# Altium PCB gclk.PcbDoc
Units mil, origin at the board's own origin, x right, y up, seen from the top; angles counter-clockwise.
Board outline 2400 x 1500 mil, 2 copper layers (Top Layer, Bottom Layer), stack 61.855 mil thick; 33 components, 43 nets, 112 pads, 21 vias.
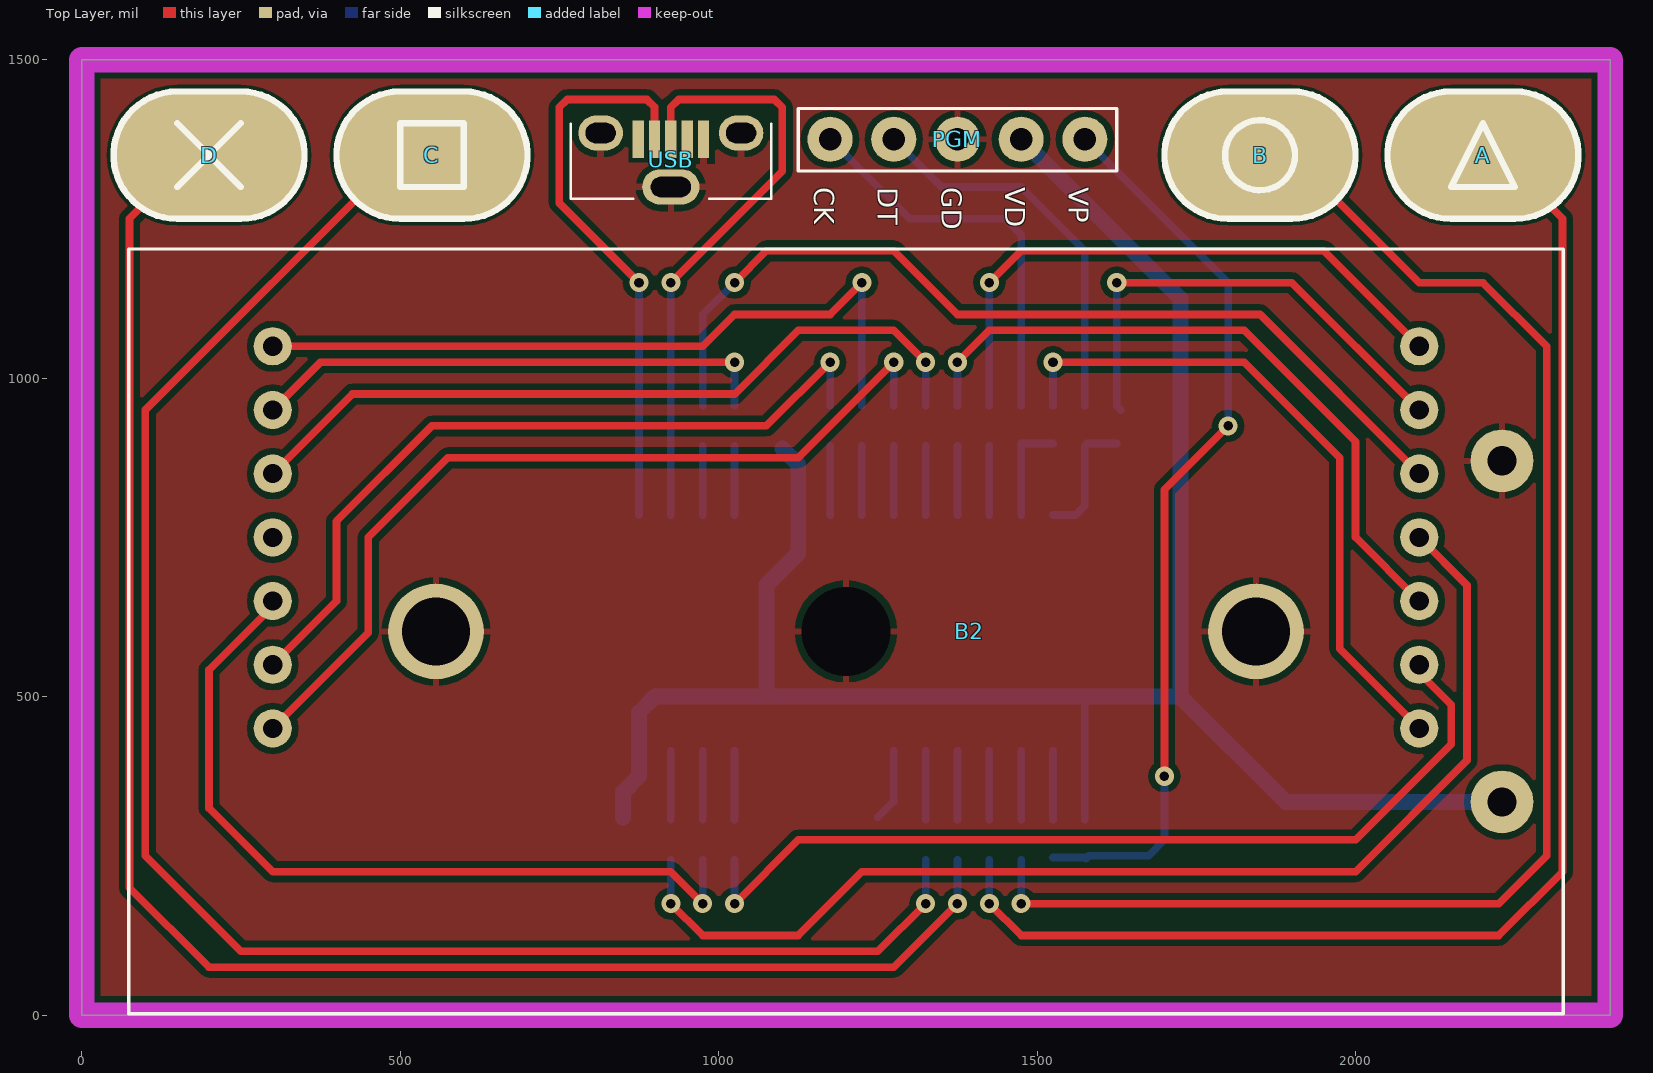
[diagram p0: Top Layer view]
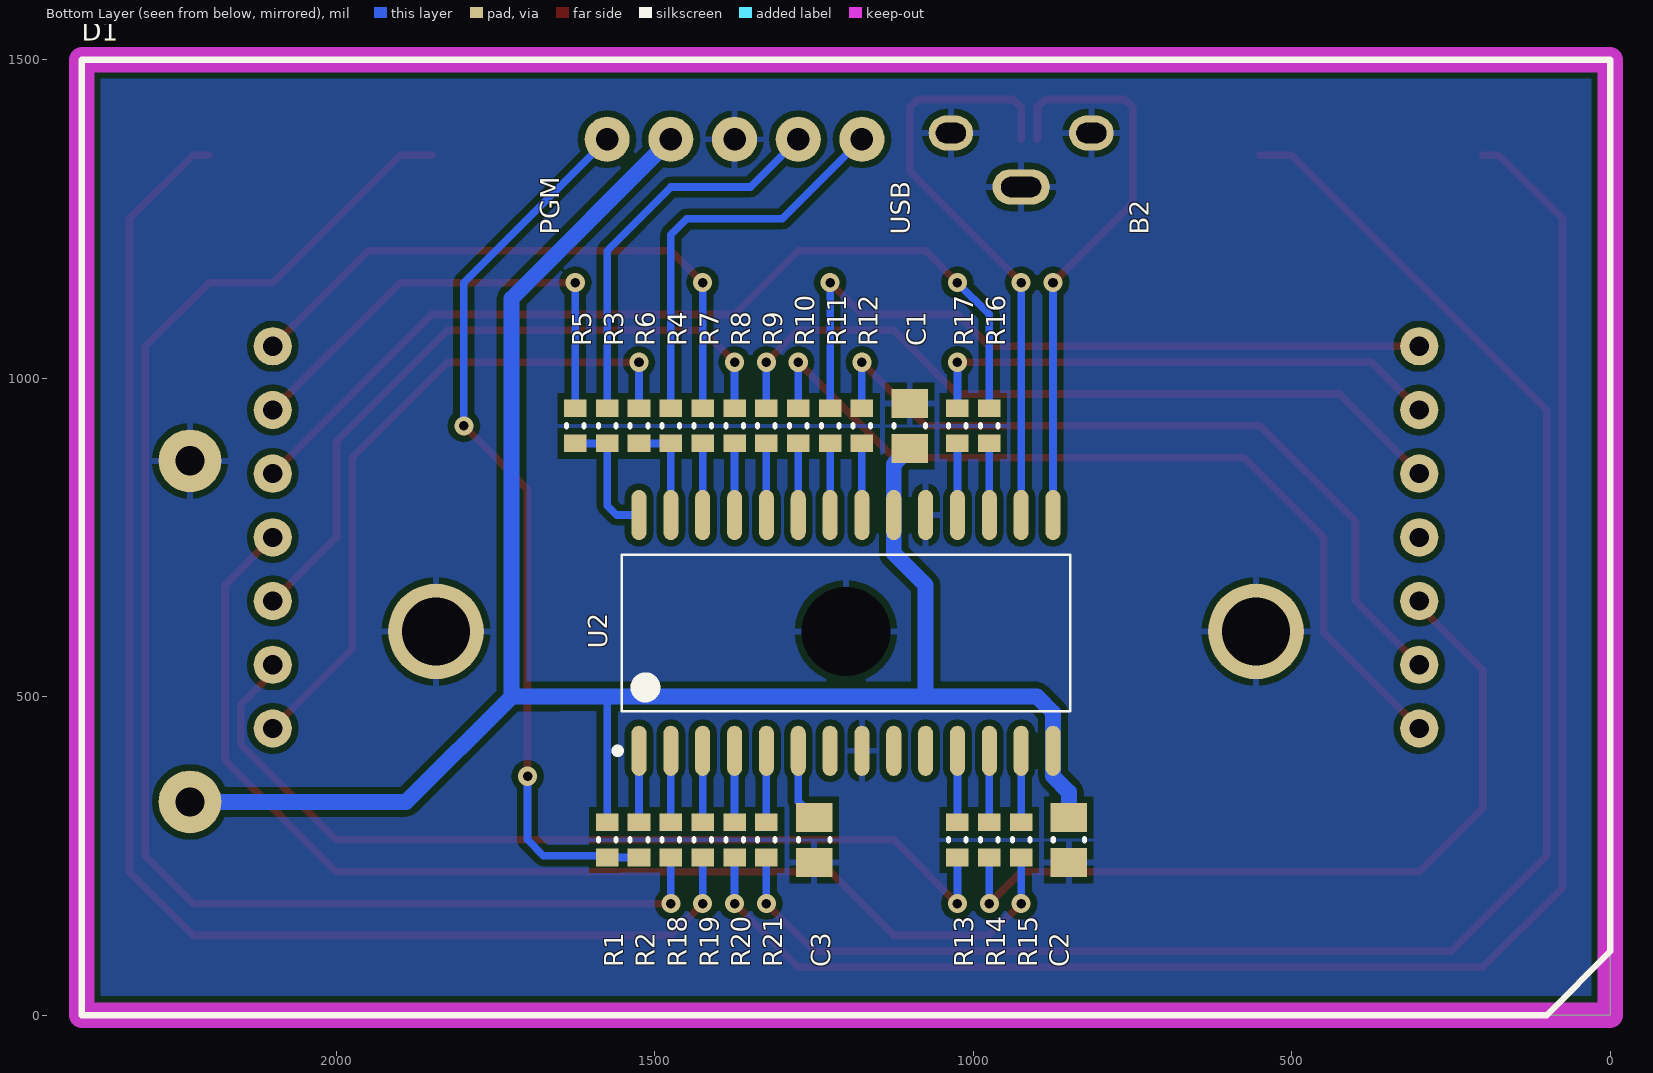
[diagram p1: Bottom Layer view, seen from below]

## Layer stack, top to bottom
Top Layer: signal copper 1.4
Dielectric: core 59.0551, FR-4, Dk 4.8
Bottom Layer: signal copper 1.4

## Board outline
0,0 2400,0 2400,1500 0,1500

## Design rules (kind name [scope] priority, off if disabled: settings)
Clearance Clearance_USB [InComponent('USB')] p1: gap=7
Clearance [All] p2: gap=10
ComponentClearance ComponentClearance_LED [InComponent('D1')] p1: gap=0 collisioncheckmode=3 verticalgap=0 showdistances=FALSE
ComponentClearance [All] p2: gap=10 collisioncheckmode=3 verticalgap=10 showdistances=FALSE
HoleSize [All] p1: absolutevalues=TRUE maxlimit=200 minlimit=10 maxpercent=80.000 minpercent=20.000
MinimumAnnularRing [All] p1: minimumring=5
MinimumSolderMaskSliver [All] p1: minsoldermaskwidth=5
PlaneConnect PlaneConnect_Mount [InPadClass('Mount')] p1: planeconnectstyle=Direct reliefexpansion=20 reliefentries=4 reliefconductorwidth=10 reliefairgap=10
PlaneConnect [All] p2: planeconnectstyle=Relief reliefexpansion=20 reliefentries=4 reliefconductorwidth=10 reliefairgap=10
PolygonConnect [All] p1: connectstyle=Relief reliefconductorwidth=10 reliefentries=4 polygonreliefangle="90 Angle" airgapwidth=10
RoutingVias [All] p1: holewidth=15 width=30 viastyle="Through Hole" minholewidth=15 minwidth=30 maxholewidth=28 maxwidth=50
SilkToSolderMaskClearance [IsPad] p1: minsilkscreentomaskgap=2 clearancetoexposedcopper=TRUE
SolderMaskExpansion [All] p1: expansion=4
Width [All] p1: maxlimit=50 minlimit=10 preferedwidth=12
23 further rules are at their usual default settings.

## Classes and differential pairs
pad class Mount: B2-0

## Components (designator, comment, footprint, x,y, rotation, side; value= is the part's Value field where it differs from the comment)
A "PAD143-190-12GA" PAD143-190-12GA 2200,1350 r90 bottom locked
B "PAD143-190-12GA" PAD143-190-12GA 1850,1350 r90 bottom locked
B2 "2 x AA" BC2AAPC 1200,602.36 r0 top locked
C "PAD143-190-12GA" PAD143-190-12GA 550,1350 r90 bottom locked
C1 "CAP 100nF 50V 0805(2012)" CAPC0805(2012)145_N 1100,925 r270 bottom locked
C2 "CAP 100nF 50V 0805(2012)" CAPC0805(2012)145_N 850,275 r90 bottom locked
C3 "CAP 100nF 50V 0805(2012)" CAPC0805(2012)145_N 1250,275 r90 bottom locked
D "PAD143-190-12GA" PAD143-190-12GA 200,1350 r90 bottom locked
D1 "LED Array" LTP-2158 1200,750 r90 bottom locked
PGM "Program Header" ProgHeader_100 1575,1375 r180 top
R1 "1K" RESC0603(1608)_L 1575,275 r90 bottom locked
R2 "1K" RESC0603(1608)_L 1525,275 r270 bottom locked
R3 "1K" RESC0603(1608)_L 1575,925 r90 bottom locked
R4 "1K" RESC0603(1608)_L 1475,925 r90 bottom locked
R5 "100R" RESC0603(1608)_L 1625,925 r90 bottom locked
R6 "100R" RESC0603(1608)_L 1525,925 r90 bottom locked
R7 "100R" RESC0603(1608)_L 1425,925 r90 bottom locked
R8 "100R" RESC0603(1608)_L 1375,925 r90 bottom locked
R9 "100R" RESC0603(1608)_L 1325,925 r90 bottom locked
R10 "100R" RESC0603(1608)_L 1275,925 r90 bottom locked
R11 "100R" RESC0603(1608)_L 1225,925 r90 bottom locked
R12 "100R" RESC0603(1608)_L 1175,925 r90 bottom locked
R13 "100R" RESC0603(1608)_L 1025,275 r90 bottom locked
R14 "100R" RESC0603(1608)_L 975,275 r90 bottom locked
R15 "100R" RESC0603(1608)_L 925,275 r90 bottom locked
R16 "100R" RESC0603(1608)_L 975,925 r90 bottom locked
R17 "100R" RESC0603(1608)_L 1025,925 r90 bottom locked
R18 "100R" RESC0603(1608)_L 1475,275 r90 bottom locked
R19 "100R" RESC0603(1608)_L 1425,275 r90 bottom locked
R20 "100R" RESC0603(1608)_L 1375,275 r90 bottom locked
R21 "100R" RESC0603(1608)_L 1325,275 r90 bottom locked
U2 "PIC18F26J53 SOIC" "Microchip SOIC 28 Wide" 1200,600 r90 bottom locked
USB "USB" 105133-0001 925,1300.2 r0 top

## Footprints (in the part's own frame and the unit in brackets; to place one, negate y for a bottom-side part, rotate by r counter-clockwise, add the part's x,y. Pads: shape width x height; smd on the part's side, far side on the other; paste and mask are expansions set on the pad)
105133-0001 [mm] "Micro USB B Receptacle Vertical Type"
  oval 1.778x1.397 hole 0.813 slot 1.2 at 0 deg unplated: 0(-2.8,2.15) 0(2.8,2.15)
  oval 2.286x1.397 hole 0.813 slot 1.6 at 0 deg unplated: 0(0,0)
  rect 0.45x1.5 smd: 1(-1.3,1.9) 2(-0.65,1.9) 3(0,1.9) 4(0.65,1.9) 5(1.3,1.9)
  silkscreen extent -4,-0.48 4,2.52, body extent -4.05,-0.53 4.05,2.57, height 6.7
BC2AAPC [mm] "Battery Holder, two AA cells"
  round 3.81 hole 2.7: 0(-16.35,0) 0(16.35,0)
  round 0 hole 3.56: 0(0,0)
  round 2.5 hole 1.17: 1(26.16,-6.8) 2(26.16,6.8)
  silkscreen extent -28.6,-15.25 28.6,15.25, body extent -28.6,-15.25 28.6,15.25, height 15
CAPC0805(2012)145_N [mm] "Chip Capacitor, Body 2.0x1.2mm, Height 1.45mm, IPC Medium Density"
  rect 1.15x1.45 smd: 1(-0.9,0) 2(0.9,0)
  silkscreen extent -0.05,-0.62 0.05,0.63, body extent -1.1,-0.72 1.1,0.73, height 1.45
LTP-2158 [mil] "LED Matrix 5x8 2.3\" Hi Effeciency Red"
  round 60 hole 30: 1(-300,-900) 2(-200,-900) 3(-100,-900) 4(0,-900) 5(100,-900) 6(200,-900) 7(300,-900) 8(300,900) 9(200,900) 10(100,900) 11(0,900) 12(-100,900) 13(-200,900) 14(-300,900)
  silkscreen extent -750,-1200 750,1200, body extent -750,-1200 750,1200, height 352
"Microchip SOIC 28 Wide" [mm] "SOIC, 28-Leads, Body 17.90x7.50mm, Pitch 1.27mm, IPC Medium Density"
  oval 2x0.6 smd: 1(-4.7,8.255) 2(-4.7,6.985) 3(-4.7,5.715) 4(-4.7,4.445) 5(-4.7,3.175) 6(-4.7,1.905) 7(-4.7,0.635) 8(-4.7,-0.635) 9(-4.7,-1.905) 10(-4.7,-3.175) 11(-4.7,-4.445) 12(-4.7,-5.715) 13(-4.7,-6.985) 14(-4.7,-8.255) 15(4.7,-8.255) 16(4.7,-6.985) 17(4.7,-5.715) 18(4.7,-4.445) 19(4.7,-3.175) 20(4.7,-1.905) 21(4.7,-0.635) 22(4.7,0.635) 23(4.7,1.905) 24(4.7,3.175) 25(4.7,4.445) 26(4.7,5.715) 27(4.7,6.985) 28(4.7,8.255)
  silkscreen extent -4.82,-8.95 3.13,9.23, body extent -3.75,-8.95 3.75,8.95, height 2.65
PAD143-190-12GA [mil]
  rrect100% 200x300 smd far side: 1(0,0)
ProgHeader_100 [mm] "Programming Header, 5 Position, 0.100\" centres"
  round 1.8 hole 0.9: 1(0,0) 2(2.54,0) 3(5.08,0) 4(7.62,0) 5(10.16,0)
  silkscreen extent -1.27,-1.23 11.43,1.27, body extent -1.27,-1.23 11.43,1.27, height 5.08
RESC0603(1608)_L [mm] "Chip Resistor, Body 1.6x0.8mm, IPC High Density"
  rect 0.7x0.9 smd: 1(-0.7,0) 2(0.7,0)
  silkscreen extent -0.05,-0.35 0.05,0.35, body extent -0.85,-0.47 0.85,0.47, height 0.6

## Part data
B2: library part BC2AAPC, "Battery Holder"
C1 C2 C3: library part CMP-1036-04422-1, "CAP 100nF 50V ±20% 0805 (2012 Metric) Thickness 1.45mm SMD"
D1: library part LTP-2158, "LED Matrix 5x8 2.3\" Hi Effeciency Red"
PGM: library part ProgHeader_100, "Programming header, 0.100\" centres"
R1 R2 R3 R4: library part CMP-1012-00510-1, "1K 0.1W 1% 0603 (1608 Metric)  SMD"
R5 R6 R7 R8 R9 R10 R11 R12 R13 R14 R15 R16 R17 R18 R19 R20 R21: library part CMP-1012-00397-1, "100R 0.1W 1% 0603 (1608 Metric)  SMD"
USB: library part 105133-0001, "Micro USB B Receptacle Vertical Type"

## Via types
v1: diameter 30, hole 15, Top Layer to Bottom Layer, 21 vias

## Nets (pads, with @x,y where several pads share a name; then routed paths per layer and width w, separated by ;. In a path a pad name is that pad's centre, name@x,y a point inside that pad or via, vN(x,y) a via of type N, cw(c..) or ccw(c..) an arc to the next point about the centre after c; other vN are vias at no path point)
BT1: B.1 R18.1 | length 2298.8
  Top Layer w12: v1(1475,175) 2225,175 2300,250 2300,1050 2200,1150 2100,1150 1900,1350 B.1
  Bottom Layer w12: v1(1475,175) R18.1@1475,243.5
BT2: A.1 R19.1 | length 2222.1
  Top Layer w12: v1(1425,175) 1475,125 2225,125 2325,225 2325,1250 2225,1350 A.1
  Bottom Layer w12: v1(1425,175) R19.1@1425,243.5
BT3: D.1 R20.1 | length 2678.1
  Top Layer w12: D.1 175,1350 75,1250 75,200 200,75 1275,75 v1(1375,175)
  Bottom Layer w12: v1(1375,175) R20.1@1375,243.5
BT4: C.1 R21.1 | length 2702.4
  Top Layer w12: C.1 500,1350 100,950 100,250 250,100 1250,100 v1(1325,175)
  Bottom Layer w12: v1(1325,175) R21.1@1325,243.5
CL1: D1.13 R13.1 | length 1442.8
  Top Layer w12: v1(1025,175) 1125,275 2000,275 2150,425 2150,487.5 2100,537.5 D1.13
  Bottom Layer w12: v1(1025,175) R13.1@1025,243.5
CL2: D1.3 R14.1 | length 1272.1
  Top Layer w12: D1.3 300,642 200,542 200,325 300,225 925,225 v1(975,175)
  Bottom Layer w12: v1(975,175) R14.1@975,243.5
CL3: D1.11 R15.1 | length 1834.2
  Top Layer w12: v1(925,175) 975,125 1125,125 1225,225 2000,225 2175,400 2175,675 D1.11
  Bottom Layer w12: v1(925,175) R15.1@925,243.5
CL4: D1.10 R16.2 | length 1454.9
  Top Layer w12: v1(1025,1150) 1075,1200 1275,1200 1375,1100 1850,1100 D1.10
  Bottom Layer w12: R16.2@975,956.5 975,1100 v1(1025,1150)
CL5: D1.6 R17.2 | length 824.6
  Top Layer w12: D1.6 375,1025 v1(1025,1025)
  Bottom Layer w12: R17.2@1025,956.5 v1(1025,1025)
CLK: PGM.5 R4.2 | length 630.6
  Bottom Layer w12: PGM.5 1300,1250 1450,1250 1475,1225 R4.2@1475,956.5
DAT: PGM.4 R3.2 | length 616
  Bottom Layer w12: PGM.4 1350,1300 1475,1300 1575,1200 R3.2@1575,956.5
GND: B2.0 B2.2 C1.1 C2.1 C3.1 PGM.3 U2.8 U2.19 USB.0 USB.5
MCLR: R2.1 U2.1 | length 108.5
  Bottom Layer w12: R2.1@1525,306.5 U2.1
NetR3_1: R3.1 R5.1 U2.28 | length 201.3
  Bottom Layer w12: U2.28 1560.04,785.04 1575,800 1575,893.5 1578.94,897.44 R5.1
NetR4_1: R4.1 R6.1 U2.27 | length 158.5
  Bottom Layer w12: U2.27 R4.1@1475,893.5 ; R4.1 R6.1
NetR7_1: R7.1 U2.26 | length 108.5
  Bottom Layer w12: U2.26 R7.1@1425,893.5
NetR8_1: R8.1 U2.25 | length 108.5
  Bottom Layer w12: U2.25 R8.1@1375,893.5
NetR9_1: R9.1 U2.24 | length 108.5
  Bottom Layer w12: U2.24 R9.1@1325,893.5
NetR10_1: R10.1 U2.23 | length 108.5
  Bottom Layer w12: U2.23 R10.1@1275,893.5
NetR11_1: R11.1 U2.22 | length 108.5
  Bottom Layer w12: U2.22 R11.1@1225,893.5
NetR12_1: R12.1 U2.21 | length 108.5
  Bottom Layer w12: U2.21 R12.1@1175,893.5
NetR13_2: R13.2 U2.11 | length 108.5
  Bottom Layer w12: R13.2@1025,306.5 U2.11
NetR14_2: R14.2 U2.12 | length 108.5
  Bottom Layer w12: R14.2@975,306.5 U2.12
NetR15_2: R15.2 U2.13 | length 108.5
  Bottom Layer w12: R15.2@925,306.5 U2.13
NetR16_1: R16.1 U2.17 | length 108.5
  Bottom Layer w12: U2.17 R16.1@975,893.5
NetR17_1: R17.1 U2.18 | length 108.5
  Bottom Layer w12: U2.18 R17.1@1025,893.5
NetR18_2: R18.2 U2.2 | length 108.5
  Bottom Layer w12: R18.2@1475,306.5 U2.2
NetR19_2: R19.2 U2.3 | length 108.5
  Bottom Layer w12: R19.2@1425,306.5 U2.3
NetR20_2: R20.2 U2.4 | length 108.5
  Bottom Layer w12: R20.2@1375,306.5 U2.4
NetR21_2: R21.2 U2.5 | length 108.5
  Bottom Layer w12: R21.2@1325,306.5 U2.5
NetU2_15: U2.15 USB.2 | length 901.8
  Top Layer w12: v1(875,1150) 750,1275 750,1425 762.5,1437.5 887.5,1437.5 899.41,1425.59 USB.2
  Bottom Layer w12: U2.15 v1(875,1150)
NetU2_16: U2.16 USB.3 | length 947.8
  Top Layer w12: v1(925,1150) 1100,1325 1100,1425 1087.5,1437.5 937.5,1437.5 925,1425 USB.3
  Bottom Layer w12: U2.16 v1(925,1150)
RW1: D1.2 R12.2 | length 1213.5
  Top Layer w12: D1.2 400,650 400,775 550,925 1075,925 v1(1175,1025)
  Bottom Layer w12: R12.2@1175,956.5 v1(1175,1025)
RW2: D1.7 R11.2 | length 1159.9
  Top Layer w12: D1.7 975,1050 1025,1100 1175,1100 v1(1225,1150)
  Bottom Layer w12: R11.2@1225,956.5 v1(1225,1150)
RW3: D1.1 R10.2 | length 1369.5
  Top Layer w12: D1.1 450,600 450,750 575,875 1125,875 v1(1275,1025)
  Bottom Layer w12: R10.2@1275,956.5 v1(1275,1025)
RW4: D1.5 R9.2 | length 1207.4
  Top Layer w12: D1.5 425,975 1025,975 1125,1075 1275,1075 v1(1325,1025)
  Bottom Layer w12: R9.2@1325,956.5 v1(1325,1025)
RW5: D1.12 R8.2 | length 1078.1
  Top Layer w12: v1(1375,1025) 1425,1075 1825,1075 2000,900 2000,750 D1.12
  Bottom Layer w12: R8.2@1375,956.5 v1(1375,1025)
RW6: D1.8 R7.2 | length 951.3
  Top Layer w12: v1(1425,1150) 1475,1200 1950,1200 D1.8
  Bottom Layer w12: R7.2@1425,956.5 v1(1425,1150)
RW7: D1.14 R6.2 | length 1057.4
  Top Layer w12: v1(1525,1025) 1825,1025 1975,875 1975,575 D1.14
  Bottom Layer w12: R6.2@1525,956.5 v1(1525,1025)
RW8: D1.9 R5.2 | length 760.5
  Top Layer w12: v1(1625,1150) 1900,1150 D1.9
  Bottom Layer w12: v1(1625,1150) 1625,956.5 R5.2@1631.5,950
VCORE: C3.2 U2.6 | length 114.9
  Bottom Layer w12: C3.2 1275,335.43 U2.6
VDD: B2.1 C1.2 C2.2 PGM.2 R1.2 U2.14 U2.20 | length 3201.4
  Bottom Layer w12: R1.2@1575,306.5 1575,500
  Bottom Layer w25: C2.2 850,350 875,375 U2.14 875,475 900,500 1075,500 ; C1.2 1125,864.57 U2.20 1125,725 1075,675 1075,500 ; PGM.2 1725,1125 1725,500 ; B2.1 1890.35,334.65 1725,500 ; 1075,500 1575,500 1650,500 1725,500
VPP: PGM.1 R1.1 R2.2 | length 1419.9
  Top Layer w12: v1(1700,375) 1700,825 v1(1800,925)
  Bottom Layer w12: R2.2 R1.1 ; PGM.1 1800,1150 v1(1800,925) ; R1.1@1576.97,245.47 1581.5,250 1675,250 1700,275 v1(1700,375)
pads on no net: D1.4 U2.7 U2.9 U2.10 USB.1 USB.4

## Polygon pours and split planes (outlines as drawn)
GND on Bottom Layer "GND" (solid, remove dead copper, pour order 2): 2400,0 0,0 0,1500 2400,1500
GND on Top Layer "GND" (solid, remove dead copper, pour order 4): 2400,0 0,0 0,1500 2400,1500

## Keep-outs
Keep-Out Layer:
  the board outline again, w40

## Silkscreen, mask and mechanical layers (free items; w line width, h text height)
Top Overlay:
  circle w10: c1850,1350 r55
  lines w10: 150,1300 250,1400 ; 150,1400 250,1300 ; 150,1250 cw(c150,1350) 150,1450 250,1450 cw(c250,1350) 250,1250 150,1250 ; 500,1250 cw(c500,1350) 500,1450 600,1450 cw(c600,1350) 600,1250 500,1250 ; 500,1300 500,1400 600,1400 600,1300 500,1300 ; 1800,1250 cw(c1800,1350) 1800,1450 1900,1450 cw(c1900,1350) 1900,1250 1800,1250 ; 2150,1250 cw(c2150,1350) 2150,1450 2250,1450 cw(c2250,1350) 2250,1250 2150,1250 ; 2150,1300 2200,1400 2250,1300 2150,1300
Top Solder:
  the board outline again, w20
Bottom Solder:
  the board outline again, w20
Drill Drawing:
  the board outline again, w10

## Text inside footprints (layer, text, board x,y; h text height)
PGM: Top Overlay "VP" at 1550,1300 h31.5 r270; Top Overlay "DT" at 1250,1300 h31.5 r270; Top Overlay "VD" at 1450,1300 h31.5 r270; Top Overlay "GD" at 1350,1300 h31.5 r270; Top Overlay "CK" at 1150,1300 h31.5 r270